# Altium PCB 示波器通道扩展.PcbDoc
Units mm, origin at the board's own origin, x right, y up, seen from the top; angles counter-clockwise.
Board outline 199.9 x 133.86 mm, 2 copper layers (Top Layer, Bottom Layer); 29 components, 32 nets, 136 pads, 0 vias.
Unrouted connection lines stored in the file: 2.
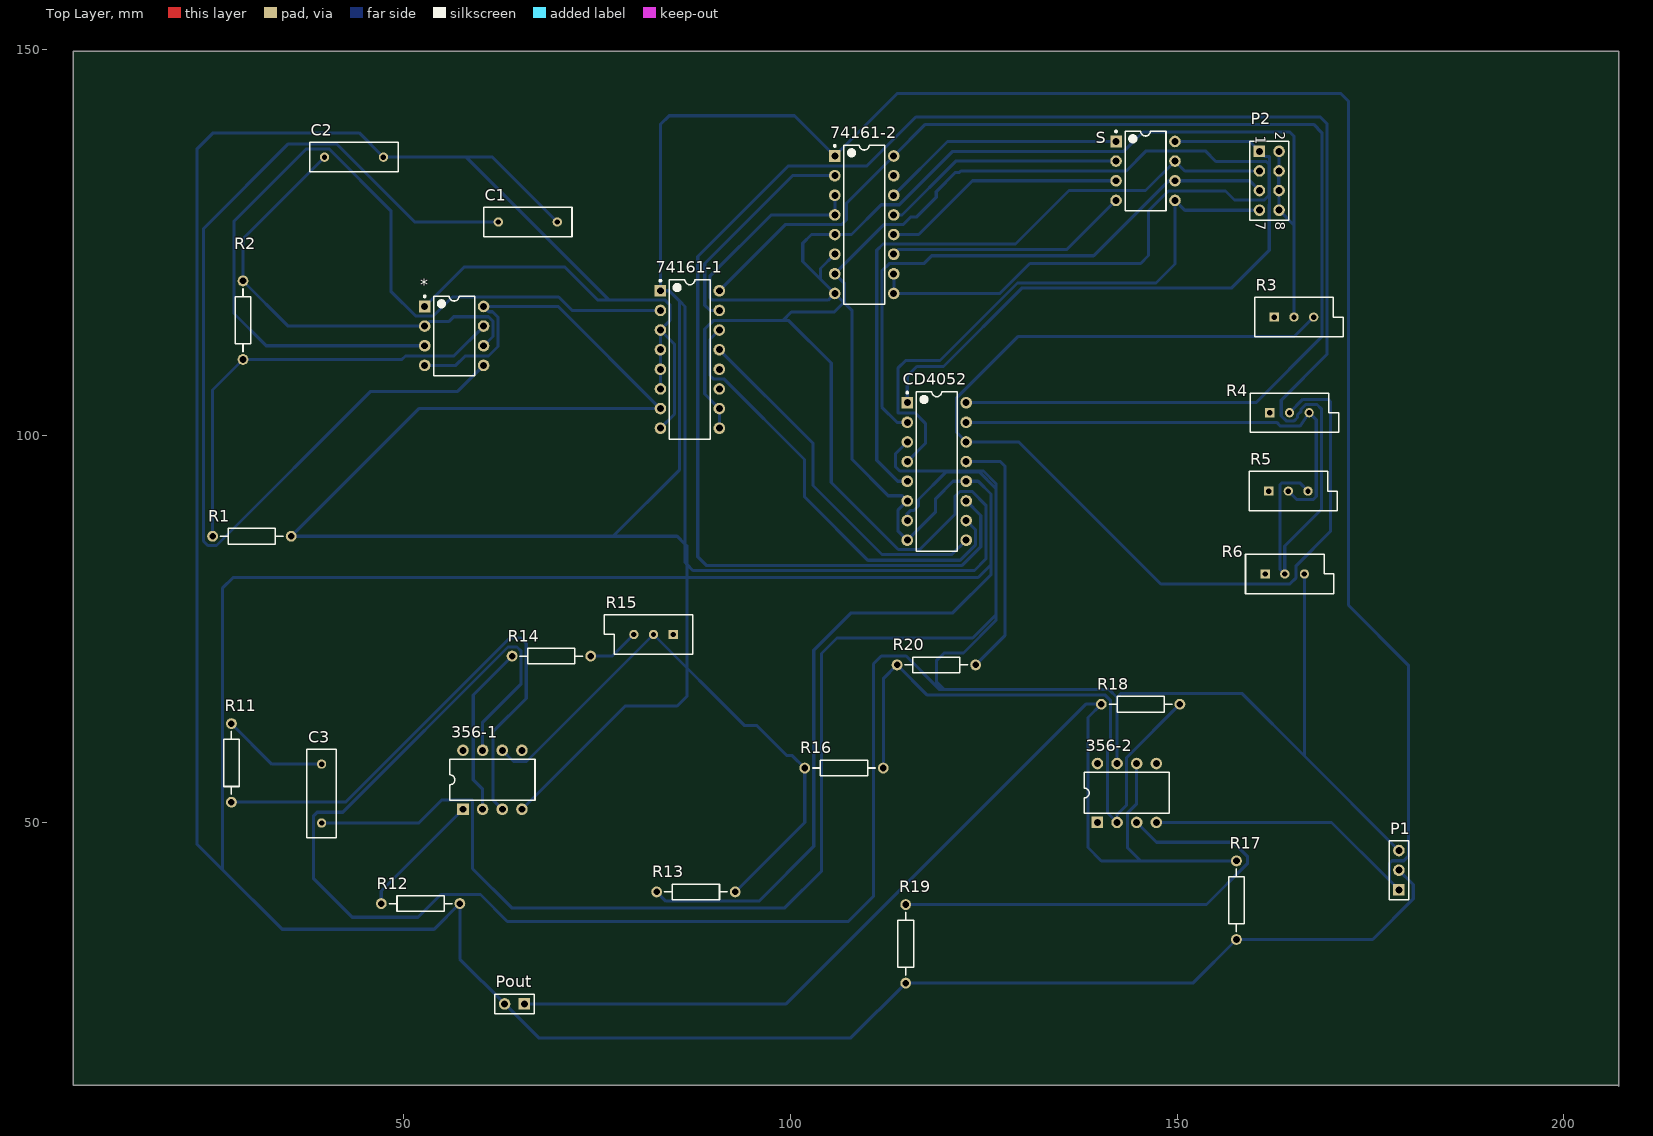
[diagram p0: Top Layer view]
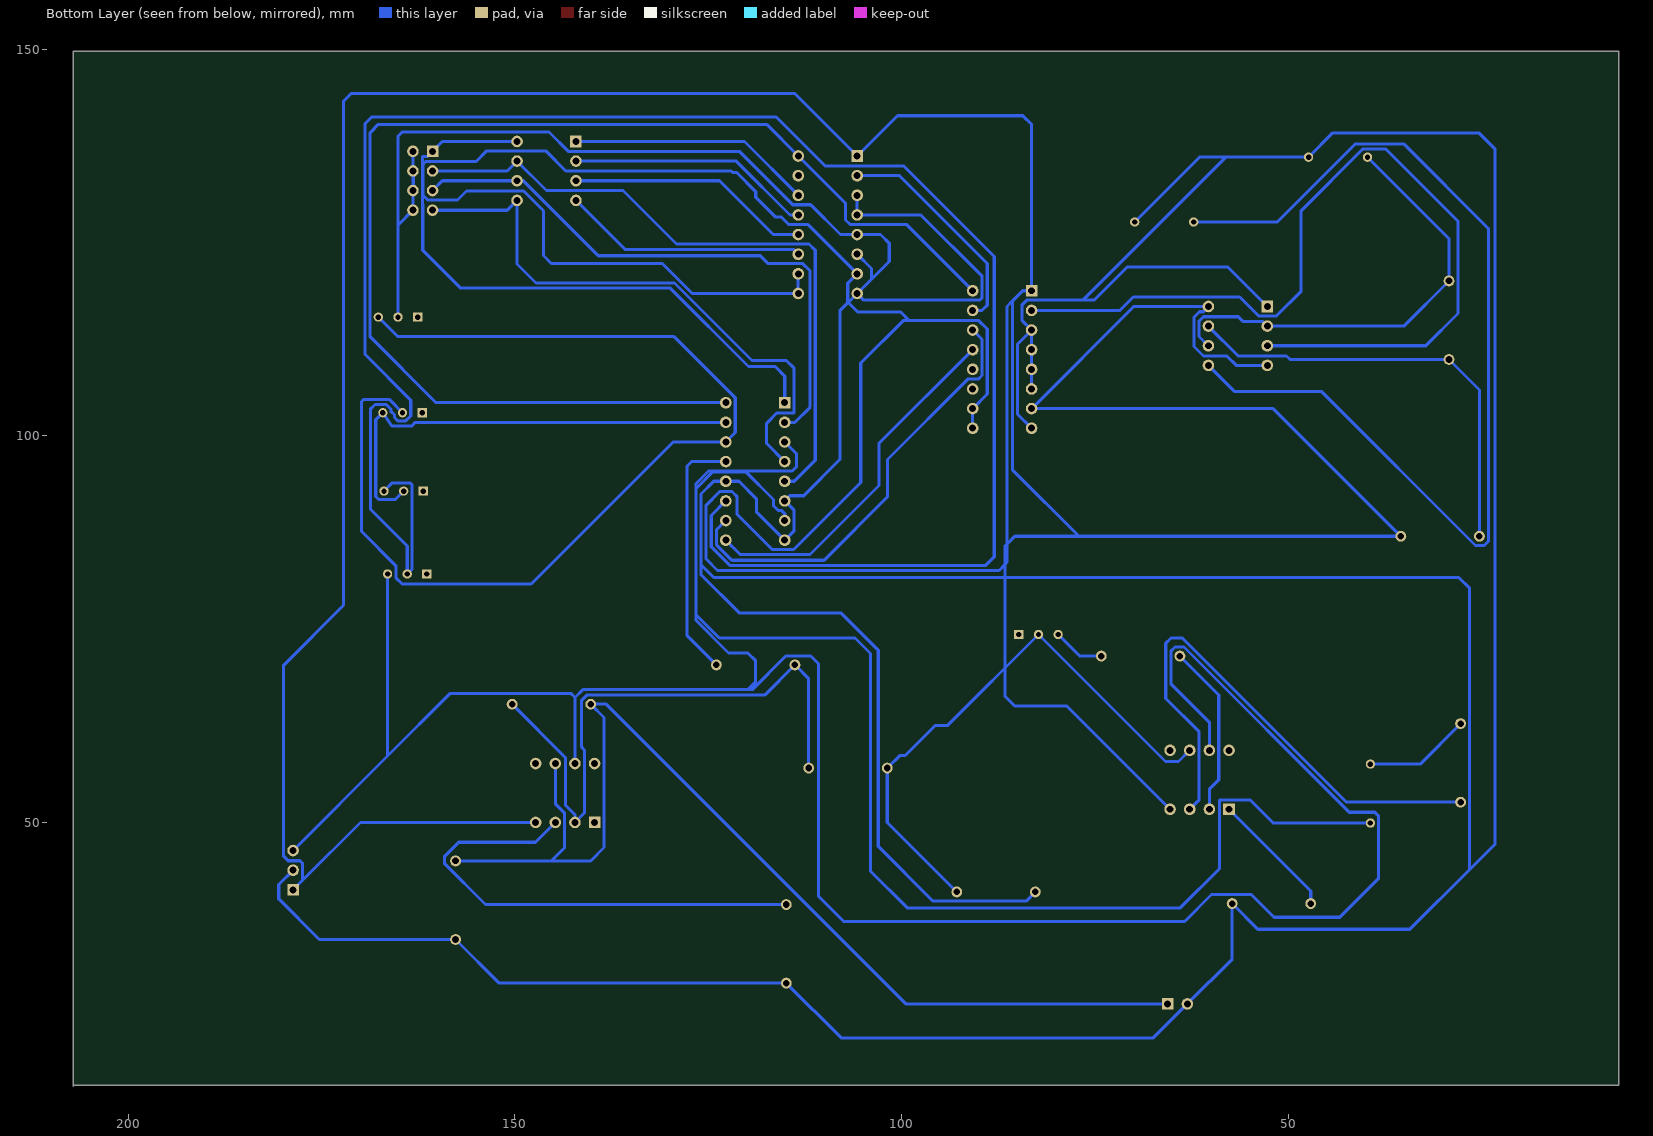
[diagram p1: Bottom Layer view, seen from below]

## Layer stack, top to bottom
Top Solder: solder mask 0.0102, Solder Resist, Dk 3.5
Top Layer: signal copper 0.0356
Dielectric1: dielectric 0.32, FR-4, Dk 4.8
Bottom Layer: signal copper 0.0356
Bottom Solder: solder mask 0.0102, Solder Resist, Dk 3.5

## Board outline
7.366,149.733 207.137,149.733 207.137,15.875 207.01,16.002 7.239,16.002 7.239,149.733

## Design rules (kind name [scope] priority, off if disabled: settings)
Clearance [All] p1: gap=0.254
PolygonConnect [All] p1: connectstyle=Relief reliefconductorwidth=0.254 reliefentries=4 polygonreliefangle="90 Angle" airgapwidth=0.254
RoutingLayers [All] p1: top layer_v5=FALSE bottom layer_v5=TRUE
RoutingVias [All] p1: holewidth=1.016 width=1.905 viastyle="Through Hole" minholewidth=1.016 minwidth=1.905 maxholewidth=1.016 maxwidth=1.905
SilkToSilkClearance [All] p1: silktosilkclearance=0
SilkToSolderMaskClearance [IsPad] p1: minsilkscreentomaskgap=0 clearancetoexposedcopper=TRUE
SolderMaskExpansion [All] p1: expansion=0.102
Width [All] p1: maxlimit=1.016 minlimit=0.254 preferedwidth=0.4
27 further rules are at their usual default settings.

## Components (designator, comment, footprint, x,y, rotation, side; value= is the part's Value field where it differs from the comment)
356-1 "LF356N" DIP8 61.468,55.499 r0 top
356-2 "LF356N" DIP8 143.51,53.797 r0 top
74161-1 "74LS160" DIP-16 86.995,109.855 r0 top
74161-2 "74LS160" DIP-16 109.55,127.279 r0 top
* "555" DIP-8 56.515,112.903 r0 top
C1 "Cap" RAD-0.3 66.04,127.635 r180 top
C2 "Cap" RAD-0.3 43.561,136.017 r180 top
C3 "Cap" RAD-0.3 39.37,53.721 r270 top
CD4052 "4052" DIP-16 118.923,95.377 r0 top
P1 "Header 3" HDR1X3 178.689,41.275 r90 top
P2 "Header 4X2" HDR2X4 160.655,136.779 r270 top
Pout "Header 2" HDR1X2 65.583,26.518 r180 top
R1 "Res2" AXIAL-0.4 30.353,86.995 r0 top
R2 "Res2" AXIAL-0.4 29.21,114.935 r90 top
R3 "RPot" VR5 165.125,115.341 r0 top
R4 "RPot" VR5 164.541,102.972 r0 top
R5 "RPot" VR5 164.389,92.837 r0 top
R6 "RPot" VR5 163.932,82.118 r0 top
R11 "Res2" AXIAL-0.4 27.711,57.683 r270 top
R12 "Res2" AXIAL-0.4 52.172,39.497 r180 top
R13 "Res2" AXIAL-0.4 87.782,40.996 r180 top
R14 "Res2" AXIAL-0.4 69.088,71.501 r180 top
R15 "RPot" VR5 82.296,74.295 r180 top
R16 "Res2" AXIAL-0.4 106.934,57.023 r180 top
R17 "Res2" AXIAL-0.4 157.683,39.929 r90 top
R18 "Res2" AXIAL-0.4 145.288,65.278 r180 top
R19 "Res2" AXIAL-0.4 114.91,34.29 r90 top
R20 "Res2" AXIAL-0.4 118.872,70.358 r180 top
S "SW-DIP4" DIP-8 145.923,134.239 r0 top

## Footprints (in the part's own frame and the unit in brackets; to place one, negate y for a bottom-side part, rotate by r counter-clockwise, add the part's x,y. Pads: shape width x height; smd on the part's side, far side on the other; paste and mask are expansions set on the pad)
AXIAL-0.4 [mm] "Axial Device, Thru-Hole; 2 Leads; 0.4 in Pin Spacing"
  round 1.4 hole 0.85: 1(-5.08,0) 2(5.08,0)
  silkscreen extent -4.06,-1.02 4.06,1.02
DIP8 [mm] "DIP; 8 Leads; Row Spacing 7.62 mm; Pitch 2.54 mm"
  rect 1.5x1.5 hole 0.9: 1(-3.81,-3.81)
  round 1.5 hole 0.9: 2(-1.27,-3.81) 3(1.27,-3.81) 4(3.81,-3.81) 5(3.81,3.81) 6(1.27,3.81) 7(-1.27,3.81) 8(-3.81,3.81)
  silkscreen extent -5.5,-2.65 5.5,2.65
DIP-8 [mm] "DIP; 8 Leads; Row Spacing 7.62 mm; Pitch 2.54 mm"
  rect 1.5x1.5 hole 0.9: 1(-3.81,3.81)
  round 1.5 hole 0.9: 2(-3.81,1.27) 3(-3.81,-1.27) 4(-3.81,-3.81) 5(3.81,-3.81) 6(3.81,-1.27) 7(3.81,1.27) 8(3.81,3.81)
  silkscreen extent -3.93,-5.15 2.65,5.23, body extent -3.6,-5.15 3.6,5.15, height 5.08
DIP-16 [mm] "DIP; 16 Leads; Row Spacing 7.62 mm; Pitch 2.54 mm"
  rect 1.5x1.5 hole 0.9: 1(-3.81,8.89)
  round 1.5 hole 0.9: 2(-3.81,6.35) 3(-3.81,3.81) 4(-3.81,1.27) 5(-3.81,-1.27) 6(-3.81,-3.81) 7(-3.81,-6.35) 8(-3.81,-8.89) 9(3.81,-8.89) 10(3.81,-6.35) 11(3.81,-3.81) 12(3.81,-1.27) 13(3.81,1.27) 14(3.81,3.81) 15(3.81,6.35) 16(3.81,8.89)
  silkscreen extent -3.93,-10.3 2.65,10.31, body extent -3.6,-10.28 3.6,10.28, height 5.08
HDR1X2 [mm] "Connector; Header; 2 Position"
  rect 1.5x1.5 hole 0.9: 1(0,0)
  round 1.5 hole 0.9: 2(2.54,0)
  silkscreen extent -1.27,-1.27 3.81,1.27
HDR1X3 [mm] "Connector; Header; 3 Position"
  rect 1.5x1.5 hole 0.9: 1(0,0)
  round 1.5 hole 0.9: 2(2.54,0) 3(5.08,0)
  silkscreen extent -1.27,-1.27 6.35,1.27
HDR2X4 [mm] "Connector; Header; 4x2 Position"
  rect 1.5x1.5 hole 0.9: 1(0,0)
  round 1.5 hole 0.9: 2(0,2.54) 3(2.54,0) 4(2.54,2.54) 5(5.08,0) 6(5.08,2.54) 7(7.62,0) 8(7.62,2.54)
  silkscreen extent -1.27,-1.27 8.89,3.81
RAD-0.3 [mm] "Radial Cap, Thru-Hole; 2 Leads; 0.3 in Pin Spacing"
  round 1.2 hole 0.7: 1(-3.81,0) 2(3.81,0)
  silkscreen extent -5.71,-1.91 5.71,1.91
VR5 [mm] "Thru-Hole; 3 Leads"
  rect 1.2x1.2 hole 0.7: 1(-2.54,0)
  round 1.2 hole 0.7: 2(0,0) 3(2.54,0)
  silkscreen extent -5.08,-2.54 6.35,2.54

## Part data
356-1 356-2: "Wide-Bandwidth Single J-FET Operational Amplifier"
C1 C2 C3: "Capacitor"
P1: "Header, 3-Pin"
P2: "Header, 4-Pin, Dual row"
Pout: "Header, 2-Pin"
R1 R2 R11 R12 R13 R14 R16 R17 R18 R19 R20: "Resistor"
R3 R4 R5 R6 R15: "Potentiometer"
S: "DIP Switch"

## Nets (pads, with @x,y where several pads share a name; then routed paths per layer and width w, separated by ;. In a path a pad name is that pad's centre, name@x,y a point inside that pad or via, vN(x,y) a via of type N, cw(c..) or ccw(c..) an arc to the next point about the centre after c; other vN are vias at no path point)
+5V: 356-1.4 356-2.4 74161-1.1 74161-1.7 74161-1.9 74161-1.10 74161-2.1 74161-2.7 74161-2.9 74161-2.10 *.4 *.8 P1.1 R1.2 | length 792.5
  Bottom Layer w0.4: *.4 56.718,109.093 57.937,110.312 60.96,110.312 62.183,111.535 62.183,115.316 61.468,116.031 61.007,116.031 *.8 69.977,116.713 74161-1.7 51.943,103.505 R1.2 77.064,86.995 ; 356-1.4 78.638,65.049 85.344,65.049 86.639,66.345 86.639,83.312 ; 74161-1.9 74161-1.10 88.925,105.385 88.925,113.792 90.018,114.884 99.009,114.884 ; 74161-2.10 113.405,120.885 113.405,118.434 74161-2.9 127.076,118.389 130.962,122.276 145.288,122.276 146.304,123.292 146.304,129.083 148.869,131.648 156.261,131.648 157.429,130.48 161.29,130.48 161.874,131.064 161.874,135.128 161.544,135.458 155.016,135.458 153.645,136.83 146.011,136.83 143.42,134.239 122.034,134.239 121.854,134.059 121.359,134.059 118.861,131.561 118.861,130.833 116.332,128.304 115.604,128.304 114.63,127.33 112.141,127.33 74161-2.7 106.959,119.71 106.959,117.297 105.664,116.002 100.127,116.002 99.009,114.884 ; 356-2.4 169.977,49.987 177.47,42.494 ; P1.1 177.47,42.494 ; 77.064,86.995 85.674,95.606 85.674,117.399 ; 77.064,86.995 85.344,86.995 86.36,85.979 ; 85.674,117.399 84.328,118.745 74161-1.1 83.185,140.233 84.328,141.376 100.533,141.376 74161-2.1 113.843,144.272 171.145,144.272 172.161,143.256 172.161,78.08 179.908,70.333 179.908,45.618 179.324,45.034 177.8,45.034 177.47,44.704 177.47,42.494 ; 85.674,117.399 86.36,116.713 86.36,85.979 ; 86.36,85.979 86.36,83.591 86.639,83.312 ; 86.36,85.979 86.639,85.7 86.639,83.312 ; 86.639,83.312 87.376,82.575 123.8,82.575 125.273,84.048 125.273,91.025 123.512,92.786 121.92,92.786 121.258,92.124 121.258,89.802 116.739,85.283 113.955,85.283 105.283,93.955 105.283,109.398 99.797,114.884 99.009,114.884
-5V: 356-1.7 356-2.7 CD4052.7 P1.3 R6.3 | length 326
  Bottom Layer w0.4: 356-1.7 60.198,62.941 65.176,67.92 65.176,72.136 64.643,72.669 63.475,72.669 42.113,51.308 38.811,51.308 38.303,50.8 38.303,42.748 43.332,37.719 51.841,37.719 54.788,40.665 59.919,40.665 63.398,37.186 107.493,37.186 110.744,40.437 110.744,70.496 111.76,71.512 114.96,71.512 119.315,67.158 119.888,67.158 ; CD4052.7 115.113,89.916 115.545,90.348 115.976,90.348 116.561,90.932 116.561,91.745 120.142,95.326 124.409,95.326 126.594,93.142 126.594,76.124 122.377,71.907 119.888,71.907 118.872,70.891 118.872,68.174 119.888,67.158 ; 356-2.7 142.24,66.142 ; R6.3 166.472,58.572 ; P1.3 166.472,58.572 ; 119.888,67.158 141.224,67.158 142.24,66.142 ; 142.24,66.142 142.773,66.675 158.369,66.675 166.472,58.572
GND: 74161-1.3 74161-1.4 74161-1.5 74161-1.6 74161-1.8 74161-2.3 74161-2.4 74161-2.5 74161-2.6 74161-2.8 *.1 C1.1 C2.1 CD4052.6 CD4052.8 CD4052.12 P1.2 P2.2 P2.4 P2.6 P2.8 Pout.2 R3.2 R12.1 R13.2 R17.1 R19.1 | length 853
  Bottom Layer w0.4: *.1 57.785,121.793 70.839,121.793 75.106,117.526 76.556,117.526 ; C1.1 61.468,136.017 58.064,136.017 ; R13.2 83.896,39.802 95.936,39.802 103.022,46.888 103.022,72.263 107.848,77.089 121.006,77.089 125.933,82.017 125.933,83.312 ; 74161-1.8 85.006,102.786 85.006,111.844 74161-1.3 ; 74161-1.6 74161-1.5 74161-1.4 74161-1.3 ; 74161-2.6 103.882,121.611 103.882,120.247 ; 74161-2.3 74161-2.4 97.511,128.549 89.586,120.625 89.586,117.856 89.916,117.526 104.877,117.526 74161-2.8 ; P2.2 P2.4 ; R3.2 165.125,127.229 ; P1.2 180.547,41.957 180.547,40.11 175.285,34.849 R17.1 152.044,29.21 R19.1 107.823,22.123 67.437,22.123 Pout.2 57.252,32.309 R12.1 53.924,36.17 34.265,36.17 26.543,43.891 ; 26.543,43.891 26.543,80.264 27.94,81.661 124.282,81.661 125.933,83.312 ; 26.543,43.891 23.241,47.193 23.241,137.058 25.349,139.167 44.221,139.167 C2.1 58.064,136.017 ; 58.064,136.017 76.556,117.526 ; 76.556,117.526 83.82,117.526 84.404,116.942 84.404,114.884 74161-1.3 ; 103.882,120.247 74161-2.8 ; 103.882,120.247 101.6,122.53 101.6,124.892 102.718,126.009 74161-2.5 107.899,126.009 111.76,129.87 114.071,129.87 120.929,136.728 143.053,136.728 145.593,139.268 164.592,139.268 165.125,138.735 165.125,127.229 ; 74161-2.8 107.975,116.154 107.975,96.916 112.657,92.234 114.446,92.234 CD4052.6 113.894,90.348 113.894,87.706 CD4052.8 118.782,90.156 118.782,91.866 121.024,94.107 CD4052.12 124.282,94.107 125.933,92.456 125.933,83.312 ; P2.6 163.136,131.758 163.136,134.18 P2.4 ; P2.6 P2.8 165.125,127.229 ; P2.6 P2.4
Net356-1_2: 356-1.2 R11.2 R14.2 | length 22.4
  Bottom Layer w0.4: 356-1.2 60.198,54.28 58.979,55.499 58.979,66.472 R14.2
Net356-1_3: 356-1.3 R12.2 | length 71
  Bottom Layer w0.4: 27.711,52.603 42.469,52.603 63.703,73.838 65.151,73.838 65.837,73.152 65.837,66.015 61.519,61.697 61.519,52.908 356-1.3
Net356-1_6: 356-1.6 R13.1 R15.2 R16.2 | length 73.4
  Bottom Layer w0.4: 356-1.6 64.186,57.861 65.862,57.861 R15.2 94.082,62.509 95.682,62.509 99.568,58.623 100.254,58.623 R16.2 101.854,49.987 R13.1
Net356-2_2: 356-2.2 R16.1 R18.1 R20.2 | length 78.7
  Bottom Layer w0.4: R16.1 112.014,68.58 R20.2 117.704,66.446 140.716,66.446 141.376,65.786 141.376,59.715 141.021,59.36 141.021,51.206 356-2.2 142.24,50.983 143.459,52.203 143.459,58.369 R18.1
Net356-2_3: 356-2.3 R19.2 | length 63.5
  Bottom Layer w0.4: R19.2 153.797,39.37 159.131,44.704 159.131,45.568 157.277,47.422 147.345,47.422 356-2.3
Net74161-2_11: 74161-2.11 S.4 | length 31.6
  Bottom Layer w0.4: 74161-2.11 113.983,124.092 135.776,124.092 S.4
Net74161-2_12: 74161-2.12 S.3 | length 31.6
  Bottom Layer w0.4: 74161-2.12 116.578,126.009 123.538,132.969 S.3
Net74161-2_13: 74161-2.13 S.2 | length 31.6
  Bottom Layer w0.4: 74161-2.13 114.421,128.549 121.38,135.509 S.2
Net74161-2_14: 74161-2.14 S.1 | length 31.6
  Bottom Layer w0.4: 74161-2.14 120.32,138.049 S.1
Net*_2: *.2 *.6 C2.2 R2.2 | length 59.5
  Bottom Layer w0.4: C2.2 29.21,125.476 R2.2 35.052,114.173 *.2 53.321,114.789 55.871,114.789 56.459,115.377 60.96,115.377 61.529,114.808 61.529,112.837 *.6
Net*_3: 74161-1.2 *.3 | length 114.1
  Bottom Layer w0.4: *.3 32.207,111.633 28.042,115.799 28.042,127.737 37.389,137.084 40.361,137.084 48.336,129.108 48.336,118.669 51.511,115.494 53.848,115.494 56.286,117.932 70.028,117.932 71.755,116.205 74161-1.2
Net*_5: *.5 C1.2 | length 133.4
  Bottom Layer w0.4: *.5 56.972,105.74 45.731,105.74 25.792,85.801 24.663,85.801 24.105,86.36 24.105,126.771 35.077,137.744 41.3,137.744 51.41,127.635 C1.2
Net*_7: *.7 R1.1 R2.1 | length 57.4
  Bottom Layer w0.4: R1.1 25.273,105.918 R2.1 49.759,109.855 50.216,110.312 56.464,110.312 *.7
NetC3_1: C3.1 R11.1 | length 13.8
  Bottom Layer w0.4: R11.1 32.944,57.531 C3.1
NetCD4052_11: CD4052.11 R5.3 R6.2 | length 259.2
  Bottom Layer w0.4: CD4052.11 124.612,89.687 124.612,85.638 122.21,83.236 89.103,83.236 88.011,84.328 88.011,123.165 99.746,134.899 109.906,134.899 116.218,141.211 168.516,141.211 169.393,140.335 169.393,110.515 163.474,104.597 163.474,102.548 164.105,101.918 165.138,101.918 165.583,102.362 165.583,102.692 166.04,103.149 166.04,103.454 166.624,104.038 168.104,104.038 168.656,103.486 168.656,90.449 163.932,85.725 R6.2 163.322,82.728 163.322,93.65 163.576,93.904 165.862,93.904 R5.3
NetCD4052_14: CD4052.14 R3.3 R4.2 | length 138.1
  Bottom Layer w0.4: R4.2 166.268,104.699 169.545,104.699 169.85,104.394 169.85,87.63 165.405,83.185 165.405,81.636 164.592,80.823 147.904,80.823 129.54,99.187 CD4052.14 121.514,100.406 121.514,104.902 129.413,112.801 165.125,112.801 R3.3
NetCD4052_15: CD4052.15 R4.3 R5.2 | length 60.9
  Bottom Layer w0.4: CD4052.15 162.884,101.727 163.347,101.264 165.913,101.264 R4.3 167.996,102.057 167.996,92.126 167.64,91.77 165.456,91.77 R5.2
NetR14_1: R14.1 R15.3 | length 6.7
  Bottom Layer w0.4: R14.1 76.962,71.501 R15.3
VCC: 74161-1.16 74161-2.16 CD4052.16 | length 164.5
  Bottom Layer w0.4: 74161-1.16 99.39,127.33 106.68,127.33 107.245,127.895 107.245,130.054 74161-2.16 117.45,140.259 167.665,140.259 168.732,139.192 168.732,112.79 160.21,104.267 CD4052.16
VI1: CD4052.1 P2.1 S.8 | length 82.2
  Bottom Layer w0.4: CD4052.1 115.113,107.696 116.357,108.941 119.786,108.941 129.921,119.075 157.023,119.075 161.925,123.977 161.925,129.921 161.976,129.972 161.976,136.119 161.315,136.119 P2.1 159.385,138.049 S.8
VI2: CD4052.5 P2.3 S.7 | length 87
  Bottom Layer w0.4: CD4052.5 113.868,94.107 111.169,96.806 111.169,123.984 111.976,124.79 129.108,124.79 136.017,131.699 145.923,131.699 S.7 151.003,134.239 P2.3
VI3: CD4052.2 P2.5 S.6 | length 75.9
  Bottom Layer w0.4: CD4052.2 113.792,101.727 111.823,103.696 111.823,121.298 112.776,122.25 117.246,122.25 118.262,123.266 139.221,123.266 148.923,132.969 S.6 159.385,132.969 P2.5
VI4: CD4052.4 P2.7 S.5 | length 76.9
  Bottom Layer w0.4: CD4052.4 117.45,98.984 117.45,101.6 116.103,102.946 113.894,102.946 113.894,108.712 114.91,109.728 119.355,109.728 129.362,119.736 147.269,119.736 149.733,122.199 S.5 151.003,129.159 P2.7
VO22: 74161-1.14 CD4052.10 | length 57.9
  Bottom Layer w0.4: 74161-1.14 89.601,112.461 89.601,107.782 90.068,107.315 91.44,107.315 101.829,96.926 101.829,92.089 110.021,83.896 121.945,83.896 123.952,85.903 123.952,87.808 CD4052.10
VO24: 74161-1.13 CD4052.9 | length 46.9
  Bottom Layer w0.4: 74161-1.13 102.914,99.016 102.914,93.557 111.841,84.629 120.875,84.629 CD4052.9
VOUT: 356-2.6 Pout.1 R17.2 R18.2 | length 143.7
  Bottom Layer w0.4: Pout.1 99.441,26.518 138.201,65.278 R18.2 138.481,63.551 138.481,46.736 140.208,45.009 145.303,45.009 ; 356-2.6 144.78,52.385 143.576,51.181 143.576,46.736 145.303,45.009 ; R17.2 145.303,45.009
VTC: 74161-1.15 74161-2.2 | length 29.1
  Bottom Layer w0.4: 74161-1.15 89.592,116.205 88.925,116.872 88.925,122.276 100.279,133.629 74161-2.2
VX: CD4052.13 R20.1 | length 32.5
  Bottom Layer w0.4: CD4052.13 127.171,96.647 127.736,96.082 127.736,74.142 R20.1
VY: C3.2 CD4052.3 | length 166.4
  Bottom Layer w0.4: C3.2 51.943,49.911 54.94,52.908 58.877,52.908 58.877,44.018 63.957,38.938 99.289,38.938 104.013,43.663 104.013,71.831 106.02,73.838 123.571,73.838 126.594,76.86 126.594,93.802 124.968,95.428 114.148,95.428 113.563,96.012 113.563,97.638 CD4052.3
pads on no net: 356-1.1 356-1.5 356-1.8 356-2.1 356-2.5 356-2.8 74161-1.11 74161-1.12 74161-2.15 R3.1 R4.1 R5.1 R6.1 R15.1
copper on no net: | length 16.6
  Bottom Layer w0.4: 47.092,39.497 47.092,41.123 57.658,51.689

## Text inside footprints (layer, text, board x,y; h text height)
P2: Top Overlay "2" at 162.687,139.319 h1.27 r270; Top Overlay "1" at 160.147,138.811 h1.27 r270; Top Overlay "7" at 160.147,127.635 h1.27 r270; Top Overlay "8" at 162.687,127.635 h1.27 r270